# Altium PCB CS5503R_DEMO_V1.PcbDoc
Units mil, origin at the board's own origin, x right, y up, seen from the top; angles counter-clockwise.
Board outline 1259.84 x 1062.99 mil, 2 copper layers (Top, Bottom), stack 12.7 mil thick; 14 components, 7 nets, 36 pads, 36 vias.
Unrouted connection lines stored in the file: 48.
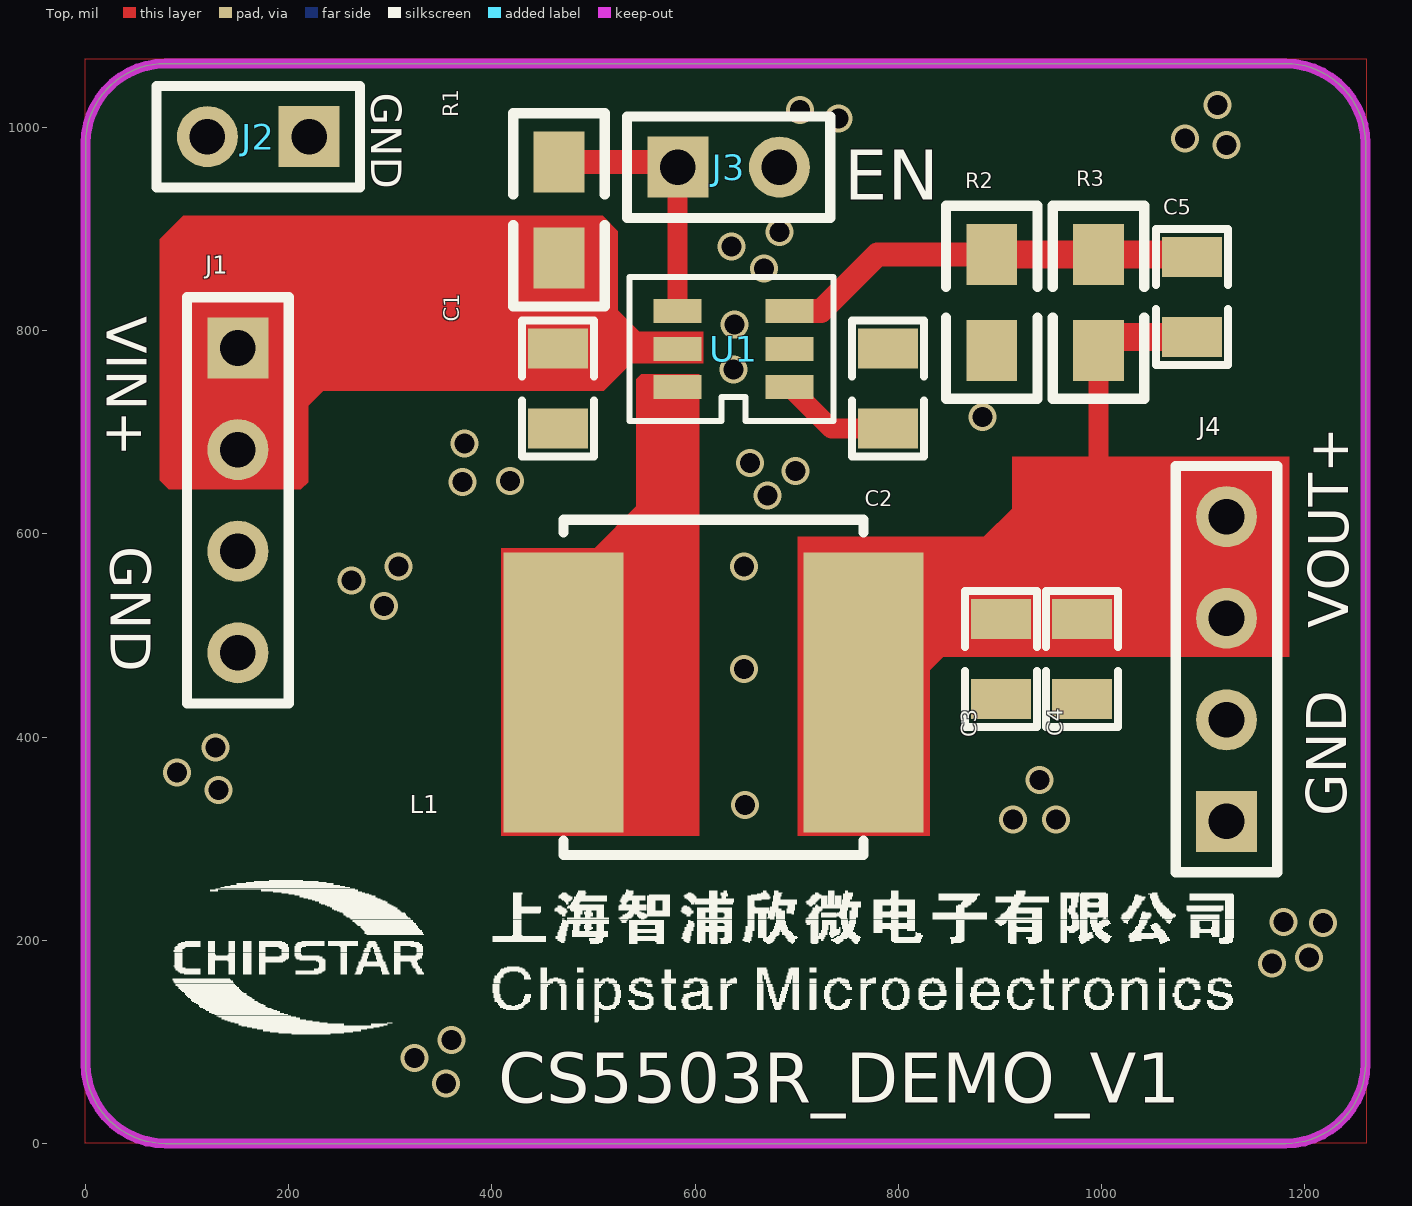
[diagram p0: Top view]
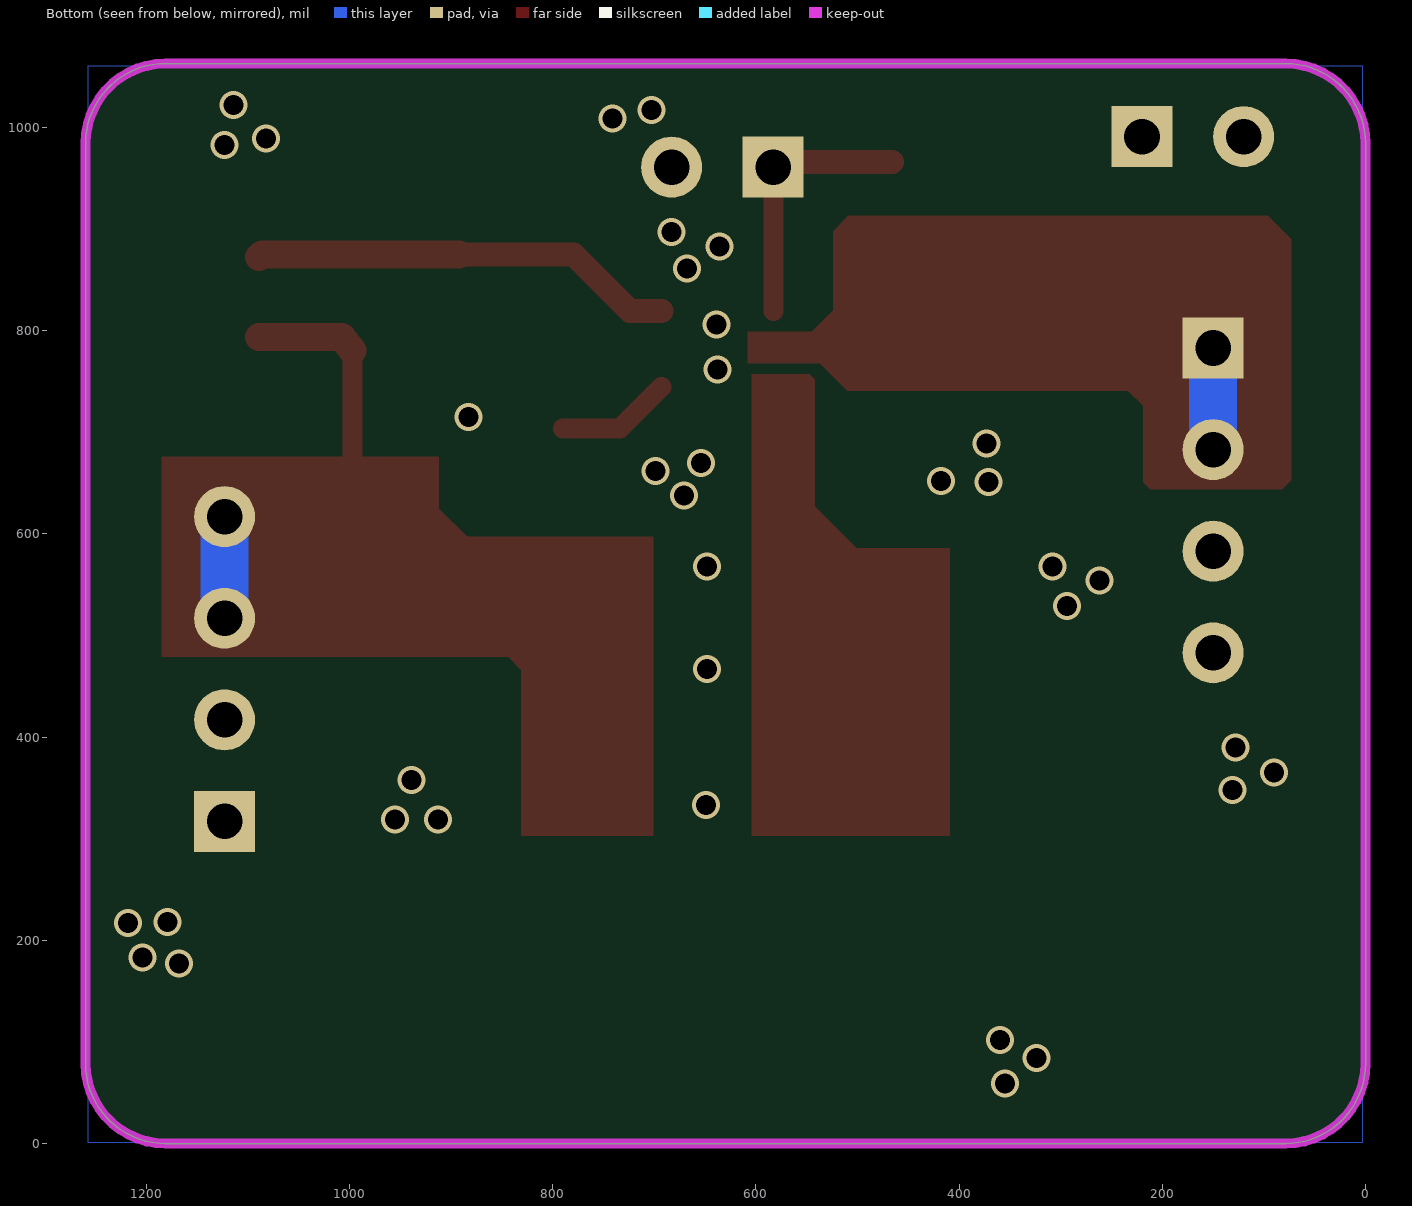
[diagram p1: Bottom view, seen from below]

## Layer stack, top to bottom
Solder Mask Top: solder mask 0.4, Solder Resist, Dk 3.5
Top: signal copper 1.35
Dielectric 1: dielectric 10, FR-4, Dk 4.3
Bottom: signal copper 1.35
Solder Mask Bottom: solder mask 0.4, Solder Resist, Dk 3.5

## Board outline
0,984.25 cw(c78.74,984.25) 78.74,1062.99 1181.1,1062.99 cw(c1181.1,984.25) 1259.84,984.25 1259.84,78.74 cw(c1181.1,78.74) 1181.1,0 78.74,0 cw(c78.74,78.74) 0,78.74

## Design rules (kind name [scope] priority, off if disabled: settings)
Clearance "Clearance - Default - DEFAULT- SMD" [IsVia vs IsSMTPin] p1: gap=7.87 ignorepadtopadclearanceinfootprint=FALSE
Clearance "Clearance - Default - DEFAULT - Via" [IsVia vs IsVia] p2: gap=7.87 ignorepadtopadclearanceinfootprint=FALSE
Clearance "Clearance - Default - DEFAULT - Net" [All] p3: gap=7.87 ignorepadtopadclearanceinfootprint=FALSE except(0: Arc-Hole Track-Hole SMDPad-Hole THPad-Hole Via-Hole Fill-Hole Poly-Hole Region-Hole Text-Hole; 10: Text-Text; 11.81: THPad-Fill THPad-Poly THPad-Region)
ComponentClearance "ComponentClearance - Default - DEFAULT" [All] p1: gap=6 collisioncheckmode=3 verticalgap=10 showdistances=FALSE
FanoutControl Fanout_Small [(CompPinCount < 5)] p3: bgadir=Out bgaviamode=Centered fanoutstyle=Auto fanoutdirection=OutThenIn viagrid=1 // Fanout_Small (Default Rule)
FanoutControl Fanout_SOIC [IsSOIC] p4: bgadir=Out bgaviamode=Centered fanoutstyle=Auto fanoutdirection=Alternating viagrid=1 // Fanout_SOIC (Default Rule)
HoleToHoleClearance "HoleToHoleClearance - Default - DEFAULT" [All] p1: gap=6 allowstackedmicrovias=TRUE
Length "Default Length" [All] p1: maxlimit=50000 minlimit=0
MaxMinImpedance "Default Impedance" [All] p1: minimum=50.00 maximum=150.0
ParallelSegment "Default Parallel Segment Adjasent" [All] p1: limit=1000 gap=200
ParallelSegment "Default Parallel Segment Same Layer" [All] p2: limit=1000 gap=200
PlaneConnect "Default PlaneConnect" [All] p1: planeconnectstyle=Direct reliefexpansion=20 reliefentries=4 reliefconductorwidth=15 reliefairgap=10
PolygonConnect "PolygonConnect - Default SMT" [IsSMTPin] p1: connectstyle=Direct reliefconductorwidth=10 reliefentries=4 polygonreliefangle="45 Angle" airgapwidth=10
PolygonConnect "PolygonConnect - Default Pad" [All] p2: connectstyle=Direct reliefconductorwidth=15 reliefentries=4 polygonreliefangle="45 Angle" airgapwidth=10
RoutingLayers "RoutingLayers - Default - DEFAULT" [All] p1: top layer_v5=TRUE bottom layer_v5=TRUE
RoutingPriority "RoutingPriority - Default - DEFAULT" [All] p1: routingpriority=3
RoutingTopology "Default Routing Topology" [All] p1: topology=Shortest
RoutingVias "RoutingVias - Default - DEFAULT" [All] p1: holewidth=37 width=55 viastyle="Through Hole" minholewidth=37 minwidth=55 maxholewidth=37 maxwidth=55
SMDToCorner "SMDToCorner - Default - DEFAULT" [All] p1: distance=78740
SolderMaskExpansion [All] p1: expansion=4 istentingtop=FALSE
Width "Default Width" [All] p1: maxlimit=39.37 minlimit=11.81 preferedwidth=11.81
20 further rules are at their usual default settings.

## Components (designator, comment, footprint, x,y, rotation, side; value= is the part's Value field where it differs from the comment)
C1 "C0805" C0805 465,743 r270 top
C2 "C0805" C0805 790,743 r270 top
C3 "C0805" C0805 901,477 r270 top
C4 "C0805" C0805 981,477 r270 top
C5 "C0805" C0805 1089,833 r270 top
J1 "SIP-4P" SIP-4P 150,783 r270 top
J2 "SIP-2P" SIP-2P 220,991 r180 top
J3 "SIP-2P" SIP-2P 583,961 r0 top
J4 "SIP-4P" SIP-4P 1123,317 r90 top
L1 "L0630" L0630 618,444 r0 top
R1 "0805" 0805 466,919 r270 top
R2 "0805" 0805 892,828 r90 top
R3 "0805" 0805 997,828 r270 top
U1 "SOT23-6" SOT23-6 638,782 r90 top

## Footprints (in the part's own frame and the unit in brackets; to place one, negate y for a bottom-side part, rotate by r counter-clockwise, add the part's x,y. Pads: shape width x height; smd on the part's side, far side on the other; paste and mask are expansions set on the pad)
0805 [mil]
  rect 60x50 smd: 1(-47.24,0) 2(47.24,0)
  silkscreen extent -95,-45 95,45
C0805 [mm]
  rect 1x1.5 smd: 1(-1,0) 2(1,0)
  silkscreen extent -1.7,-0.9 1.7,0.9
L0630 [mm]
  rect 3x7 smd: 1(-3.75,0) 2(3.75,0)
  silkscreen extent -3.75,-4.06 3.75,4.32
SIP-2P [mil]
  rect 60x60 / inner round 60 / far side rect 60x60 hole 35: 1(0,0)
  round 60 hole 35: 2(100,0)
  silkscreen extent -50,-50 150,50
SIP-4P [mil]
  rect 60x60 / inner round 60 / far side rect 60x60 hole 35: 1(0,0)
  round 60 hole 35: 2(100,0) 3(200,0) 4(300,0)
  silkscreen extent -50,-50 350,50
SOT23-6 [mm]
  rect 0.6x1.2 smd: 1(-0.95,-1.4) 2(0,-1.4) 3(0.95,-1.4) 4(0.95,1.4) 5(0,1.4) 6(-0.95,1.4)
  silkscreen extent -1.8,-2.5 1.8,2.6

## Via types
v1: diameter 27.56, hole 19.68, Top to Bottom, 36 vias

## Nets (pads, with @x,y where several pads share a name; then routed paths per layer and width w, separated by ;. In a path a pad name is that pad's centre, name@x,y a point inside that pad or via, vN(x,y) a via of type N, cw(c..) or ccw(c..) an arc to the next point about the centre after c; other vN are vias at no path point)
BS: C2.2 U1.1 | length 113.9
  Top w19.68: U1.1 734,703.72 734,703.63 C2.2
EN: J3.1 R1.1 U1.4 | length 260.8
  Top w19.68: U1.4 582.88,960.88 J3.1
  Top w23.62: R1.1 577.76,966.24 J3.1
FB: C5.1 R2.2 R3.1 U1.3 | length 420.2
  Top w23.62: U1.3 724,819.4 779.6,875 891.76,875 R2.2
  Top w27.56: R2.2 1086.13,875.24 C5.1
GND: C1.2 C2.1 C3.2 C4.2 J1.3 J1.4 J2.1 J2.2 J3.2 J4.1 J4.2 R2.1 U1.2
  other v1: 355,59 324,84 360,102 1168,177 1204,183 1218,217 1179,218 913,319 955,319 649,333 131,348 939,358 90,365 128,390 648,467 294,529 262,554 308,568 648,568 671,638 371,651 418,652 699,662 654,670 373,689 883,715 638,762 639,806 668,861 636,883 683,897 1123,983 1082,989 741,1009 703,1017 1114,1022
LX: L1.1 U1.6 | length 347.2
  Top w11.81: L1.1 471,444.64 471,485.12 582.88,597 U1.6
OUT+: C3.1 C4.1 C5.2 J4.3 J4.4 L1.2 R3.2 | length 1005.6
  Top w11.81: C3.1 C4.1@971,516.37 ; C4.1 C4.1@971,516.37 ; J4.3 971.63,517 C4.1@971,516.37
  Top w19.68: L1.2 765.64,519.37 C3.1 ; R3.2 997,615 999,617 J4.4@1113,617 ; 1044,610 1051,617 J4.4@1113,617 ; J4.4 J4.4@1113,617
  Top w27.56: R3.2 1007.63,793.63 C5.2
  Bottom w47.24: J4.3 J4.4
VIN+: C1.1 J1.1 J1.2 R1.2 U1.5 | length 625.5
  Top w19.68: J1.1 581.88,783 U1.5 ; C1.1 465,873 R1.2
  Bottom w47.24: J1.2 J1.1

## Polygon pours and split planes (outlines as drawn)
GND on Top (solid, remove dead copper, pour order 0): -1,1067 -1,1 1261,1 1261,1067
GND on Bottom (solid, remove dead copper, pour order 1): 3,1061 3,1 1257,1 1257,1061

## Keep-outs
Keep-Out Layer:
  the board outline again, w10

## Other copper
Top:
  region net LX: 409,303 604,303 604,757 547,757 542,752 542,627 501,586 409,586 409,303
  region net OUT+: 701,303 831,303 831,466 844,479 1185,479 1185,676 912,676 912,625 884,597 701,597 701,303
  region net VIN+: 608,768 537,768 510,741 234,741 219,726 219,651 212,644 82,644 73,653 73,890 96,913 509,913 524,898 524,820 545,799 608,799 608,768

## Silkscreen, mask and mechanical layers (free items; w line width, h text height)
Silkscreen Top:
  drawing of 3058 lines, arcs and shapes, not listed
  text "GND" at 281,1034 h30 r270
  text "EN" at 747,929 h49.21
  text "VIN+" at 21,814 h39.37 r270
  text "GND" at 25,588 h39.37 r270
  text "VOUT+" at 1243,507 h39.37 r90
  text "GND" at 1241,322 h39.37 r90
  text "CS5503R_DEMO_V1" at 406,40 h49.21